# Altium PCB debugging_board_PFC161.PcbDoc
Units mm, origin at the board's own origin, x right, y up, seen from the top; angles counter-clockwise.
Board outline 67.6 x 30.7 mm, 2 copper layers (Top Layer, Bottom Layer); 46 components, 24 nets, 124 pads, 61 vias.
Unrouted connection lines stored in the file: 2.
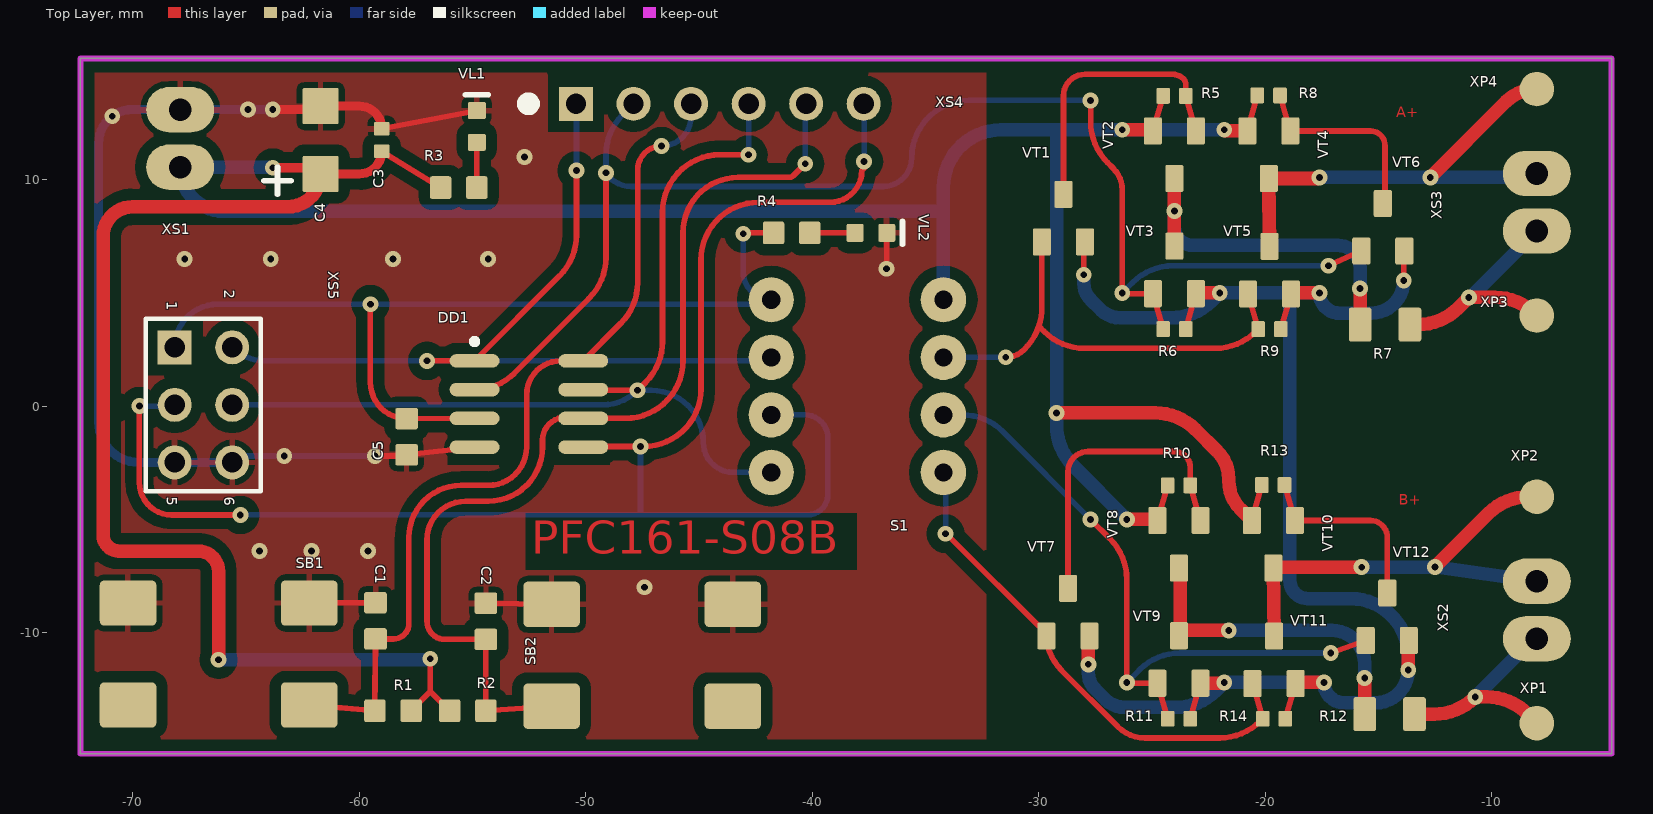
[diagram p0: Top Layer view]
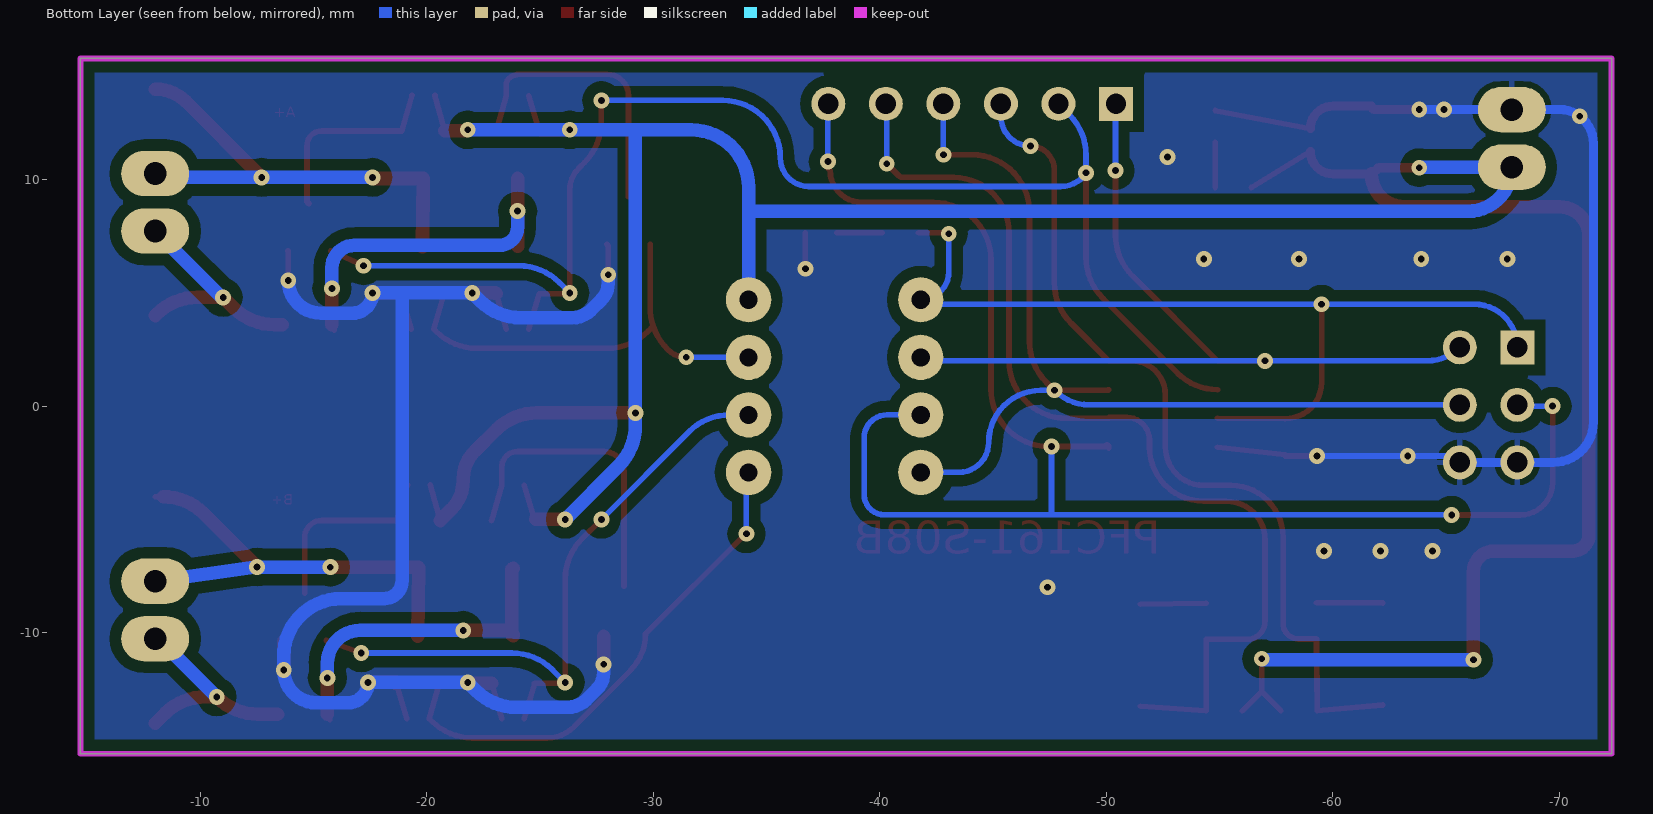
[diagram p1: Bottom Layer view, seen from below]
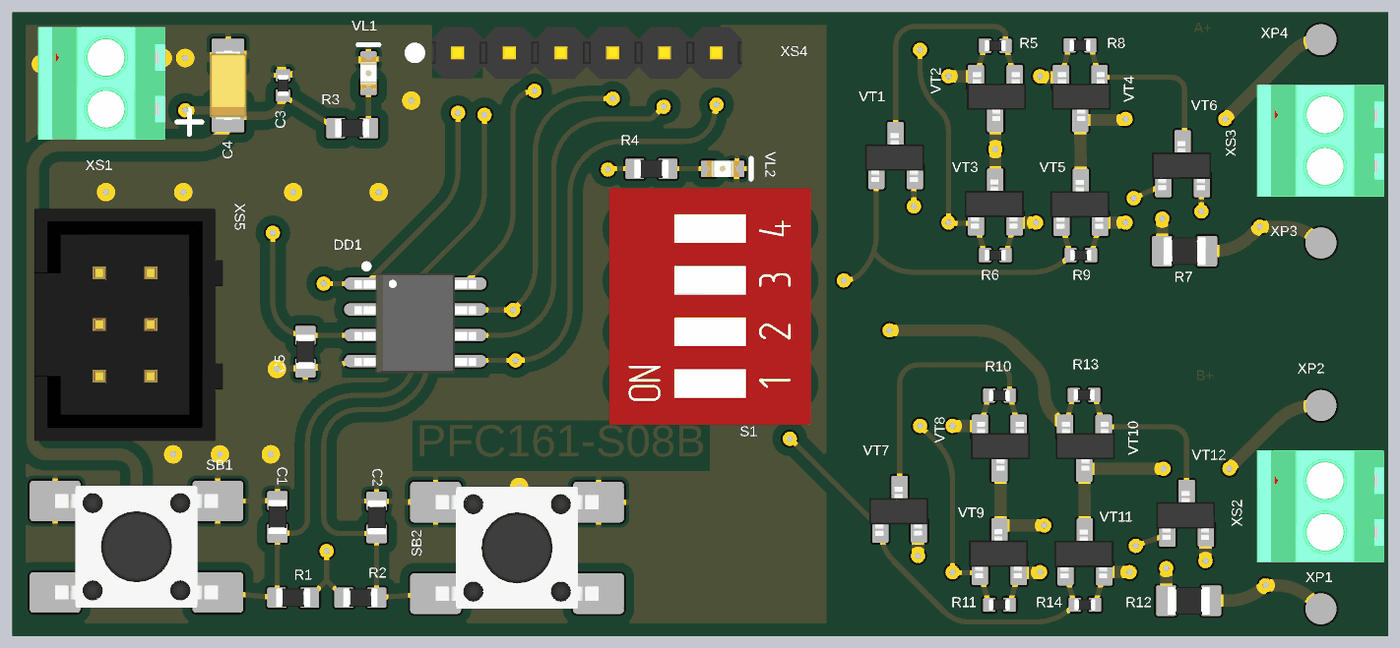
[diagram p2: 3D render of the assembled board from above, using the file's embedded part models]

## Layer stack, top to bottom
Top Solder: solder mask 0.0102, Solder Resist, Dk 3.5
Top Layer: signal copper 0.0356
Dielectric 1: dielectric 0.32, FR-4, Dk 4.8
Bottom Layer: signal copper 0.0356
Bottom Solder: solder mask 0.0102, Solder Resist, Dk 3.5

## Board outline
-72.3,-15.35 -4.7,-15.35 -4.7,15.35 -72.3,15.35

## Design rules (kind name [scope] priority, off if disabled: settings)
Clearance [All] p1: gap=0.23 ignorepadtopadclearanceinfootprint=FALSE except(0.5: Arc-Poly Track-Poly SMDPad-Poly THPad-Poly Via-Poly Fill-Poly Poly-Poly)
PolygonConnect [All] p1: thpad.connectstyle=Relief thpad.reliefconductorwidth=0.254 thpad.reliefentries=4 thpad.polygonreliefangle="90 Angle" thpad.airgapwidth=0.254 smdpad.connectstyle=Relief smdpad.reliefconductorwidth=0.254 smdpad.reliefentries=4 smdpad.polygonreliefangle="90 Angle" smdpad.airgapwidth=0.254 via.connectstyle=Direct via.reliefconductorwidth=0.254 via.reliefentries=4 via.polygonreliefangle="90 Angle" via.airgapwidth=0.254
RoomDefinition debugging_board_PFC161 [InComponentClass('debugging_board_PFC161')] p1: confinementstyle=ConfineIn formatcopy=TRUE lockcomponents=FALSE outline -133.3,-61.25 -82.5,-61.25 -82.5,-35.85 -133.3,-35.85
RoomDefinition U_MCU_PFC161 [InComponentClass('U_MCU_PFC161')] p2: confinementstyle=ConfineIn formatcopy=TRUE lockcomponents=FALSE outline -72.3,-15.55 -32.5,-15.55 -32.5,15.35 -72.3,15.35
RoomDefinition U_H_bridge_PFC1612 [InComponentClass('U_H_bridge_PFC1612')] p3: confinementstyle=ConfineIn formatcopy=TRUE lockcomponents=FALSE outline -31.7,-14.95 -11.9,-14.95 -11.9,-2.35 -31.7,-2.35
RoomDefinition U_H_bridge_PFC1611 [InComponentClass('U_H_bridge_PFC1611')] p4: confinementstyle=ConfineIn formatcopy=TRUE lockcomponents=FALSE outline -31.9,2.25 -12.1,2.25 -12.1,14.85 -31.9,14.85
RoutingVias [All] p1: holewidth=0.3 width=0.7 viastyle="Through Hole" minholewidth=0.3 minwidth=0.7 maxholewidth=0.3 maxwidth=0.7
SolderMaskExpansion [All] p1: expansion=0.102 istentingtop=FALSE
Width [All] p1: maxlimit=0.8 minlimit=0.25 preferedwidth=0.6
30 further rules are at their usual default settings.

## Classes and differential pairs
channel class H_bridge_PFC161: U_H_bridge_PFC1611 U_H_bridge_PFC1612
component class U_MCU_PFC161: C1 C2 C3 C4 C5 DD1 R1 R2 R3 R4 S1 SB1 SB2 VL1 VL2 XS4
component class U_H_bridge_PFC1612: R10 R11 R12 R13 R14 VT7 VT8 VT9 VT10 VT11 VT12
component class U_H_bridge_PFC1611: R5 R6 R7 R8 R9 VT1 VT2 VT3 VT4 VT5 VT6
component class debugging_board_PFC161: XP1 XP2 XP3 XP4 XS2 XS4

## Components (designator, comment, footprint, x,y, rotation, side; value= is the part's Value field where it differs from the comment)
C1 "0,1uF" SMD0603(1005) -59.275,-9.48 r270 top
C2 "0,1uF" SMD0603(1005) -54.4,-9.5 r270 top
C3 "0,1uF" SMD0402(1608) -59,11.75 r90 top
C4 "10uF x 10V" TANT_CAP_A(3216) -61.7,11.75 r90 top
C5 "10nF" SMD0603(1005) -57.9,-1.35 r90 top
DD1 "PFC161-S08B" SOIC8 -52.5,0.055 r0 top
R1 "20k" SMD0603(1005) -58.5,-13.45 r0 top
R2 "20k" SMD0603(1005) -55.2,-13.45 r180 top
R3 "500" SMD0603(1005) -55.6,9.65 r0 top
R4 "500" SMD0603(1005) -40.9,7.65 r0 top
R5 "20к" SMD0402(1608) -24,13.7 r0 top
R6 "20к" SMD0402(1608) -24,3.4 r0 top
R7 "10" SMD0805(2012) -14.7,3.6 r180 top
R8 "20к" SMD0402(1608) -19.838,13.719 r0 top
R9 "20к" SMD0402(1608) -19.8,3.4 r0 top
R10 "20к" SMD0402(1608) -23.8,-3.5 r0 top (schematic designator R5)
R11 "20к" SMD0402(1608) -23.8,-13.8 r0 top (schematic designator R6)
R12 "10" SMD0805(2012) -14.5,-13.6 r180 top (schematic designator R7)
R13 "20к" SMD0402(1608) -19.638,-3.481 r0 top (schematic designator R8)
R14 "20к" SMD0402(1608) -19.6,-13.8 r0 top (schematic designator R9)
S1 "DS1040-04RN" DIP_SWITCH_4_2.54 -34.2,-2.925 r180 top
SB1 "KLS7-TS6604" "KLS7-TS6604 (IT-1102SA)" -66.2,-10.945 r270 top
SB2 "KLS7-TS6604" "KLS7-TS6604 (IT-1102SA)" -47.5,-11 r90 top
VL1 "TO-1608BC-MRE" LED_SMD0603(1005) -54.8,12.35 r90 top
VL2 "TO-1608BC-PG" LED_SMD0603(1005) -37.4,7.65 r0 top
VT1 "IRLML0040TRPBF" SOT23-3 -28.9,8.3 r90 top
VT2 "IRLML2244TRPBF" SOT23-3 -24,11.1 r270 top
VT3 "IRLML0040TRPBF" SOT23-3 -24,6.015 r90 top
VT4 "IRLML2244TRPBF" SOT23-3 -19.828,11.1 r270 top
VT5 "IRLML0040TRPBF" SOT23-3 -19.8,6 r90 top
VT6 "IRLML0040TRPBF" SOT23-3 -14.8,7.9 r90 top
VT7 "IRLML0040TRPBF" SOT23-3 -28.7,-9.1 r90 top (schematic designator VT1)
VT8 "IRLML2244TRPBF" SOT23-3 -23.8,-6.1 r270 top (schematic designator VT2)
VT9 "IRLML0040TRPBF" SOT23-3 -23.8,-11.185 r90 top (schematic designator VT3)
VT10 "IRLML2244TRPBF" SOT23-3 -19.628,-6.1 r270 top (schematic designator VT4)
VT11 "IRLML0040TRPBF" SOT23-3 -19.6,-11.2 r90 top (schematic designator VT5)
VT12 "IRLML0040TRPBF" SOT23-3 -14.6,-9.3 r90 top (schematic designator VT6)
XP1 "A+" XP_solder#1 -7.7,-14.1 r0 top
XP2 "A-" XP_solder#2 -7.9,-4.4 r90 top
XP3 "B+" XP_solder#3 -9.4,2.9 r90 top
XP4 "B-" XP_solder#4 -9.6,14.9 r90 top
XS1 "Клемник винтовой" XS_2x2.54MM -67.9,11.82 r90 top
XS2 "Клемник винтовой" XS_2x2.54MM -8,-9 r90 top
XS3 "Клемник винтовой" XS_2x2.54MM -8,9 r90 top
XS4 "PLS1x6" PLS1x6 -50.42,13.35 r90 top
XS5 "IDC6" "IDC-6 (2.54)" -68.14,2.595 r270 top

## Footprints (in the part's own frame and the unit in brackets; to place one, negate y for a bottom-side part, rotate by r counter-clockwise, add the part's x,y. Pads: shape width x height; smd on the part's side, far side on the other; paste and mask are expansions set on the pad)
DIP_SWITCH_4_2.54 [mm]
  round 2 hole 0.8: 1(0,0) 2(0,-2.54) 3(0,-5.08) 4(0,-7.62) 5(7.6,-7.62) 6(7.6,-5.08) 7(7.6,-2.54) 8(7.6,0)
  body extent -1.14,-9.62 8.76,2, height 6.8
"IDC-6 (2.54)" [mm]
  rect 1.5x1.5 hole 0.9: 1(0,0)
  round 1.5 hole 0.9: 2(0,2.54) 3(2.54,0) 4(2.54,2.54) 5(5.08,0) 6(5.08,2.54)
  silkscreen extent -1.27,-1.27 6.35,3.81, body extent -3.1,-3.07 8.33,6.2, height 9.27
"KLS7-TS6604 (IT-1102SA)" [mm]
  rrect20% 2x2.5 smd: 1(-2.25,4) 1(-2.25,-4) 2(2.25,4) 2(2.25,-4)
  body extent -3,-4 3,4, height 5
LED_SMD0603(1005) [mm] "Chip Resistor, Body 0.6x0.3mm, IPC Medium Density"
  rrect20% 0.75x0.8 smd: 1(-0.7,0) 2(0.7,0)
  silkscreen extent 1.4,-0.5 1.4,0.5, body extent -0.8,-0.4 0.8,0.4, height 0.55
PLS1x6 [mm]
  rect 1.5x1.5 hole 0.9: 1(0,0)
  round 1.5 hole 0.9: 2(0,-2.54) 3(0,-5.08) 4(0,-7.62) 5(0,-10.16) 6(0,-12.7)
  silkscreen extent -0.25,1.85 0.25,2.35, body extent -1.27,-13.97 1.27,1.27, height 8.6
SMD0402(1608) [mm] "Chip Resistor, Body 0.6x0.3mm, IPC Medium Density"
  rrect20% 0.6x0.7 smd: 1(-0.5,0) 2(0.5,0)
  body extent -0.52,-0.27 0.53,0.27, height 0.4
SMD0603(1005) [mm] "Chip Resistor, Body 0.6x0.3mm, IPC Medium Density"
  rrect20% 0.95x1 smd: 1(-0.8,0) 2(0.8,0)
  body extent -0.85,-0.45 0.85,0.45, height 0.55
SMD0805(2012) [mm] "Chip Resistor, Body 0.6x0.3mm, IPC Medium Density"
  rrect20% 1x1.5 smd: 1(-1.1,0) 2(1.1,0)
  body extent -1.05,-0.68 1.05,0.67, height 0.6
SOIC8 [mm]
  oval 2.2x0.6 smd: 1(-2.4,1.945) 2(-2.4,0.675) 3(-2.4,-0.595) 4(-2.4,-1.865) 5(2.4,-1.865) 6(2.4,-0.595) 7(2.4,0.675) 8(2.4,1.945)
  silkscreen extent -2.52,2.67 -2.27,2.92, body extent -2.99,-2.45 2.99,2.45, height 1.35
SOT23-3 [mm]
  rrect20% 1.2x0.8 smd: 1(-1.05,0.95) 2(-1.05,-0.95) 3(1.05,0)
  body extent -1.3,-1.4 1.1,1.5, height 1
TANT_CAP_A(3216) [mm]
  rrect10% 1.6x1.6 smd: 1(-1.5,0) 2(1.5,0)
  silkscreen extent -2.4,1.3 -1.2,2.5, body extent -1.7,-0.9 1.7,0.9, height 1.8
XP_solder#1 [mm]
  round 1.524 smd: 1(-0.3,0.1)
XP_solder#2 [mm]
  round 1.524 smd: 1(0.4,0.1)
XP_solder#3 [mm]
  round 1.524 smd: 1(1.1,-1.4)
XP_solder#4 [mm]
  round 1.524 smd: 1(-0.9,-1.6)
XS_2x2.54MM [mm]
  oval 2x3 hole 1: 1(-1.27,0) 2(1.27,0)
  body extent -2.73,-3.12 2.8,3.15, height 8.5

## Part data
C1 C2: Package=SMD0603, ValueBOM="Конденсатор керамический 0,1мкФ SMD 0603 1%", Type=C
C3: Package=SMD0402, ValueBOM="Конденсатор керамический 0,1мкФ х 50В SMD 0402 1%", Type=C
C4: Package="SMD A", ValueBOM="Конденсатор танталовый 10мкФ х 10В SMD A", Type=C
C5: Package=SMD0402, ValueBOM="Конденсатор керамический 10нФ х 50В SMD 0402 1%", Type=C
DD1: Package=SOIC-8, ValueBOM="Микроконтроллер PFC161-S08B, SOIC-8", Type=DD
R1 R2: Package=SMD0603, ValueBOM="Резистор 20кОм SMD 0603 1%", Type=R
R3 R4: Package=SMD0603, ValueBOM="Резистор 500 Ом SMD 0603 1%", Type=R
R5 R6 R8 R9 R10 R11 R13 R14: Package=SMD0402, ValueBOM="Резистор 20кОм SMD 0402 1%", Type=R
R7 R12: Package=SMD0805, ValueBOM="Резистор 10 Ом SMD 0805 1%", Type=R
S1: library part "Переключатель DIP DS1040-04RN", Package=DIP, Type=S, ValueBOM="Переключатель DIP DS1040-04RN"
SB1 SB2: Package="SMD 6х6х5mm", ValueBOM="KLS7-TS6604-5.0-180 (IT-1102SA), Кнопка тактовая 6х6х5мм SMD", Type=SB
VL1: Package=SMD0603, ValueBOM="Светодиод Красный TO-1608BC-MRE SMD0603", Light=Красный, Type=VL
VL2: Package=SMD0603, ValueBOM="Светодиод Зелёный TO-1608BC-PG SMD0603", Light=Зелёный, Type=VL
VT1 VT3 VT5 VT6 VT7 VT9 VT11 VT12: library part VT_N_MOSFET_SOT23_3, Package=SOT-23, ValueBOM="Транзистор n-МОП IRLML0040TRPBF SOT23", Type=VT
VT2 VT4 VT8 VT10: library part VT_P_MOSFET_SOT23_3, Package=SOT-23, ValueBOM="Транзистор p-МОП IRLML2244TRPBF SOT23", Type=VT
XP1 XP2 XP3 XP4: library part XP_solder
XS1 XS2 XS3: library part "Клемник винтовой 2-контактный, 2,54мм", Package=2,54mm, ValueBOM="308-021-14, Клеммник винтовой, 2-контактный, 2.54мм, прямой", Type=XS
XS4: Package=2,54mm, ValueBOM="Разъём PLS1x6 прямой", Type=XS
XS5: Package=2,54mm, ValueBOM="Разъём IDC6 прямой", Type=XS

## Via types
v1: diameter 0.7, hole 0.3, Top Layer to Bottom Layer, 61 vias

## Nets (pads, with @x,y where several pads share a name; then routed paths per layer and width w, separated by ;. In a path a pad name is that pad's centre, name@x,y a point inside that pad or via, vN(x,y) a via of type N, cw(c..) or ccw(c..) an arc to the next point about the centre after c; other vN are vias at no path point)
+5V: C3.1 C4.1 R1.2 R2.2 R3.1 R5.1 R8.1 R10.1 R13.1 S1.4 VT2.2 VT4.2 VT8.2 VT10.2 XS1.1 | length 154.1
  Top Layer w0.25: C4.1@-62.367,10.526 cw(c-62.367,9.583) -61.939,10.424 cw(c-62.367,9.583) C4.1 ; C3.1 R3.1 ; R1.2 -56.857,-12.607 -56.857,-12.593 ; v1(-56.857,-11.154) -56.857,-12.593 ; R2.2 -56.857,-12.593 ; VT2.2@-25,12.2 cw(c-25,12.15) VT2.2 R5.1 ; VT8.2@-24.8,-5 cw(c-24.8,-5.05) VT8.2 R10.1 ; v1(-21.8,12.2) ccw(c-21.75,12.2) v1@-21.75,12.15 ; VT4.2 R8.1 R8.1@-20.35,13.719 ; VT10.2 R13.1
  Top Layer w0.4: v1(-63.808,10.526) -62.367,10.526 -62.042,10.526 cw(c-62.042,10.424) C4.1@-61.939,10.424 ; C4.1 -60,10.25 ccw(c-60,11.25) C3.1
  Top Layer w0.6: v1(-66.203,-11.196) -66.2,-11.196 -66.2,-7.3 ccw(c-67.1,-7.3) -67.1,-6.4 -70.6,-6.4 cw(c-70.6,-5.7) -71.3,-5.7 -71.3,7.5 cw(c-70,7.5) -70,8.8 -63.15,8.8 ccw(c-63.15,10.25) C4.1 ; v1(-29.2,-0.3) -24.852,-0.3 cw(c-24.852,-2.84) -23.056,-1.044 -22.1,-2 cw(c-23.307,-3.207) -21.6,-3.207 -21.6,-3.3 ccw(c-19.842,-3.3) -21.085,-4.543 VT10.2 ; v1(-26.3,12.2) VT2.2@-25,12.2 ; v1(-26.1,-5) VT8.2@-24.8,-5 ; v1@-21.75,12.15 VT4.2
  Bottom Layer w0.6: v1(-66.203,-11.196) -56.9,-11.196 ccw(c-56.9,-11.154) v1(-56.857,-11.154) ; v1(-63.808,10.526) ccw(c-63.832,10.526) -63.832,10.55 XS1.1 ccw(c-65.95,10.55) -65.95,8.6 -34.2,8.6 ; S1.4 -34.2,9.66 cw(c-31.66,9.66) -31.66,12.2 -29.2,12.2 ; v1(-26.1,-5) -28.456,-2.644 cw(c-26.66,-0.848) -29.2,-0.848 v1(-29.2,-0.3) -29.2,12.2 ; v1(-21.8,12.2) v1(-26.3,12.2) -29.2,12.2
GND: C1.1 C2.1 C3.2 C4.2 C5.1 DD1.4 R6.2 R9.2 R11.2 R14.2 SB1.1 SB2.2 VL1.2 VL2.2 VT1.2 VT3.2 VT5.2 VT6.2 VT7.2 VT9.2 VT11.2 VT12.2 XS1.2 XS5.5 XS5.6 | length 128.7
  Top Layer w0.25: SB1.1@-62.2,-8.695 C1.1 ; C4.2@-62.068,13.097 ccw(c-62.068,13.618) C4.2 ; v1(-59.3,-2.2) -57.9,-2.2 C5.1 DD1.4 ; C3.2 VL1.2 ; C2.1 SB2.2@-51.5,-8.75 ; v1(-36.708,6.066) -36.708,7.65 VL2.2 ; v1(-28,5.8) -28,7.029 cw(c-27.829,7.029) VT1.2@-27.95,7.15 ; VT7.2@-27.8,-10.171 cw(c-27.629,-10.171) VT7.2@-27.75,-10.05 ; R6.2 VT3.2 ; R11.2 VT9.2 ; R9.2 VT5.2 ; R14.2 VT11.2 v1(-17.4,-12.2) ; v1(-13.874,5.551) -13.874,6.826 cw(c-13.85,6.826) VT6.2 ; VT12.2@-13.674,-10.374 cw(c-13.65,-10.374) VT12.2
  Top Layer w0.4: v1(-63.808,13.097) -62.068,13.097 -61.853,13.097 ccw(c-61.853,13.25) C4.2 -60,13.25 cw(c-60,12.25) C3.2
  Top Layer w0.6: v1(-27.8,-11.4) VT7.2@-27.8,-10.171 ; VT3.2 cw(c-23.015,4.965) -23.015,5 v1(-22,5) ; VT9.2 -21.835,-12.235 ccw(c-21.835,-12.2) v1(-21.8,-12.2) ; VT5.2 cw(c-18.8,4.95) -18.8,5 v1(-17.6,5) ; VT11.2 cw(c-18.6,-12.25) -18.6,-12.2 v1(-17.4,-12.2) ; v1(-13.674,-11.649) VT12.2@-13.674,-10.374
  Bottom Layer w0.25: XS5.6 -65.6,-2.116 -65.516,-2.2 v1(-59.3,-2.2)
  Bottom Layer w0.4: XS5.6 XS5.5 -69.715,-2.485 cw(c-69.715,-0.7) -71.5,-0.7 -71.5,11.6 cw(c-70,11.6) -70,13.1 -67.9,13.1 XS1.2 -63.808,13.09 v1(-63.808,13.097)
  Bottom Layer w0.6: v1(-28,5.8) -28,5.424 ccw(c-26.976,5.424) -27.7,4.7 -27.254,4.254 ccw(c-26.4,5.107) -26.4,3.9 -24.152,3.9 ccw(c-24.152,6.44) -22.356,4.644 v1(-22,5) -18.9,5 ; v1(-27.8,-11.4) -27.8,-11.776 ccw(c-26.776,-11.776) -27.5,-12.5 -27.054,-12.946 ccw(c-26.2,-12.093) -26.2,-13.3 -23.952,-13.3 ccw(c-23.952,-10.76) -22.156,-12.556 v1(-21.8,-12.2) v1(-17.4,-12.2) ccw(c-16.5,-12.2) -16.5,-13.1 -15.125,-13.1 ccw(c-15.125,-11.649) v1(-13.674,-11.649) -13.674,-11.04 ccw(c-16.214,-11.04) -16.214,-8.5 -18.1,-8.5 cw(c-18.1,-7.7) -18.9,-7.7 -18.9,5 ; v1(-13.874,5.551) cw(c-15.325,5.551) -15.325,4.1 -16.7,4.1 cw(c-16.7,5) v1(-17.6,5) -18.9,5
  other v1: -47.4,-8 -64.4,-6.4 -62.1,-6.4 -59.6,-6.4 -63.3,-2.2 -67.7,6.5 -63.9,6.5 -58.5,6.5 -54.3,6.5 -52.7,11 -70.9,12.8 -64.908,13.097
NetR3_2: R3.2 VL1.1 | length 2
  Top Layer w0.25: R3.2 VL1.1
NetR4_2: R4.2 VL2.1 | length 2
  Top Layer w0.25: R4.2 VL2.1
NetR5_2: R5.2 VT1.3 VT2.1 | length 12.7
  Top Layer w0.25: VT1.3@-28.9,9.25 -28.9,10.697 ; -28.9,10.698 -28.9,13.7 cw(c-27.95,13.7) -27.95,14.65 -24.083,14.65 cw(c-24.083,13.967) -23.6,14.45 cw(c-23.841,14.209) -23.5,14.209 R5.2 VT2.1
NetR7_1: R7.1 XP3.1 XS3.1 | length 10.4
  Top Layer w0.6: R7.1 -13.252,3.6 ccw(c-13.252,6.14) -11.456,4.344 v1(-11,4.8) -9.852,4.8 cw(c-9.852,2.26) -8.056,4.056 XP3.1
  Bottom Layer w0.25: v1(-11,4.8) ccw(c-11,4.969) v1@-10.881,4.849
  Bottom Layer w0.6: v1@-10.88,4.85 XS3.1
NetR7_2: R7.2 VT2.3 VT3.3 | length 15.7
  Top Layer w0.25: R7.2@-15.9,3.359 cw(c-15.559,3.359) R7.2
  Top Layer w0.6: VT3.3 v1(-24,8.612) ; v1@-24,8.557 v1(-24,8.612) ; VT2.3 v1(-24,8.612) ; R7.2 v1(-15.8,5.2)
  Bottom Layer w0.6: v1(-24,8.612) -24,7.9 ccw(c-23.2,7.9) -23.2,7.1 -16.8,7.1 cw(c-16.8,6.1) -15.8,6.1 v1(-15.8,5.2)
NetR8_2: R8.2 VT4.1 VT6.3 | length 8.8
  Top Layer w0.25: R8.2 VT4.1 -15.35,12.15 cw(c-15.35,11.5) -14.7,11.5 -14.7,9.05 cw(c-14.8,9.05) VT6.3
NetR9_1: R9.1 S1.3 VT1.1 VT5.1 | length 20.8
  Top Layer w0.25: v1(-31.445,2.155) ccw(c-31.445,3.3) -30.636,2.489 ccw(c-32.531,4.386) -29.99,3.53 ; VT1.1@-29.85,7.15 -29.85,4.386 cw(c-32.531,4.386) -29.99,3.53 ; VT5.1 R9.1 -20.406,3.294 cw(c-22.202,5.09) -22.202,2.55 -25.491,2.55 -25.493,2.55 -27.958,2.55 cw(c-27.958,5.09) -29.754,3.294 -29.99,3.53
  Bottom Layer w0.25: S1.3 v1(-31.445,2.155) ; v1(-31.445,2.155) ccw(c-31.445,2.3) -31.3,2.3 v1(-31.445,2.155)
NetR10_2: R10.2 VT7.3 VT8.1 | length 13.8
  Top Layer w0.25: VT7.3@-28.7,-7.95 -28.7,-2.9 cw(c-27.8,-2.9) -27.8,-2 -24,-2 cw(c-24,-2.7) -23.3,-2.7 R10.2 VT8.1
NetR11_1: R11.1 S1.2 VT9.1 VT12.1 | length 30.3
  Top Layer w0.25: v1(-27.7,-5) -26.844,-5.856 cw(c-28.64,-7.652) -26.1,-7.652 v1(-26.1,-12.2) ccw(c-26.015,-12.115) -26.015,-12.235 VT9.1 R11.1 ; v1(-17.1,-10.9) VT12.1 cw(c-15.671,-10.229) VT12.1@-15.671,-10.4
  Bottom Layer w0.25: S1.2 -33.367,-0.385 cw(c-33.367,-2.925) -31.571,-1.129 v1(-27.7,-5) ; v1(-26.1,-12.2) -25.543,-11.643 cw(c-23.747,-13.439) -23.747,-10.899 -22.748,-10.899 -22.752,-10.897 ; -22.748,-10.9 v1(-17.1,-10.9)
NetR12_1: R12.1 XP1.1 XS2.1 | length 9.8
  Top Layer w0.6: R12.1 -12.534,-13.6 ccw(c-12.534,-11.06) -10.738,-12.856 v1(-10.72,-12.838) ; v1@-10.748,-12.85 ccw(c-10.748,-12.81) v1(-10.72,-12.838) ; XP1.1 -8.418,-13.582 ccw(c-10.214,-15.378) -10.214,-12.838 v1(-10.72,-12.838)
  Bottom Layer w0.25: XS2.1@-8.259,-10.377 cw(c-8,-10.636) XS2.1
  Bottom Layer w0.6: v1(-10.72,-12.838) XS2.1@-8.259,-10.377
NetR12_2: R12.2 VT8.3 VT9.3 | length 14.7
  Top Layer w0.25: R12.2@-15.7,-13.841 cw(c-15.359,-13.841) R12.2
  Top Layer w0.6: VT8.3 -23.75,-7.2 -23.75,-8.693 VT9.3@-23.75,-9.99 ; v1(-21.6,-9.9) -23.565,-9.9 ccw(c-23.565,-10.135) VT9.3@-23.75,-9.99 ; R12.2 v1(-15.6,-12) ; VT9.3@-23.75,-9.99 ccw(c-23.565,-10.135) VT9.3 -23.75,-10.085 VT9.3@-23.75,-9.99
  Bottom Layer w0.6: v1(-21.6,-9.9) -17.052,-9.9 cw(c-17.052,-11.352) -15.6,-11.352 v1(-15.6,-12)
NetR13_2: R13.2 VT10.1 VT12.3 | length 8.6
  Top Layer w0.25: R13.2 VT10.1 -15.35,-5.05 cw(c-15.35,-5.8) -14.6,-5.8 VT12.3
NetR14_1: R14.1 S1.1 VT7.1 VT11.1 | length 22.7
  Top Layer w0.25: v1(-34.102,-5.635) cw(c-34.102,-5.722) -34.04,-5.66 -29.65,-10.05 ccw(c-27.356,-10.05) -28.978,-11.672 -26.5,-14.15 ccw(c-25.293,-12.943) -25.293,-14.65 -22.002,-14.65 ccw(c-22.002,-12.11) -20.206,-13.906 R14.1 VT11.1
  Bottom Layer w0.25: S1.1 cw(c-34.437,-3.162) -34.102,-3.162 v1(-34.102,-5.635)
NetVT4_3: VT4.3 VT5.3 XP4.1 XS3.2 | length 21.1
  Top Layer w0.6: VT5.3 VT4.3 -17.721,10.05 ccw(c-17.721,10.221) v1(-17.6,10.1) ; v1(-12.7,10.1) -9.366,13.434 cw(c-8,12.069) XP4.1
  Bottom Layer w0.6: v1(-17.6,10.1) v1(-12.7,10.1) -8.41,10.1 ccw(c-8.41,10.68) XS3.2
NetVT10_3: VT10.3 VT11.3 XP2.1 XS2.2 | length 20.4
  Top Layer w0.25: XP2.1@-8.348,-4 XP2.1
  Top Layer w0.6: VT11.3 VT10.3 cw(c-19.588,-7.15) -19.588,-7.11 v1(-15.732,-7.11) ; v1(-12.5,-7.1) -10.144,-4.744 cw(c-8.348,-6.54) XP2.1@-8.348,-4
  Bottom Layer w0.6: v1(-15.732,-7.11) -12.51,-7.11 v1(-12.5,-7.1) XS2.2
PA3: DD1.7 S1.8 XS4.4 XS5.4 | length 44.2
  Top Layer w0.25: DD1.7 ccw(c-50.027,0.803) -50.027,0.7 v1(-47.7,0.7) -47.344,1.056 ccw(c-49.14,2.852) -46.6,2.852 -46.6,8.56 cw(c-44.06,8.56) -44.06,11.1 v1(-42.8,11.1)
  Bottom Layer w0.25: XS5.4 -49.257,0.055 ccw(c-49.257,2.257) v1(-47.7,0.7) -47.1,0.7 cw(c-47.1,-1.6) -44.8,-1.6 ccw(c-43.475,-1.6) -43.475,-2.925 S1.8 ; v1(-42.8,11.1) XS4.4
PA4: C1.2 DD1.8 R1.1 SB1.2 XS4.3 | length 38.6
  Top Layer w0.25: SB1.2@-62.2,-13.195 R1.1 C1.2 -58.48,-10.28 ccw(c-58.48,-9.6) -57.8,-9.6 -57.8,-5.8 cw(c-55.5,-5.8) -55.5,-3.5 -54.3,-3.5 ccw(c-54.3,-1.8) -52.6,-1.8 -52.6,0.5 cw(c-51.1,0.5) -51.1,2 DD1.8 -48.444,3.656 ccw(c-50.24,5.452) -47.7,5.452 -47.7,10.427 cw(c-46.641,10.427) v1(-46.641,11.485)
  Bottom Layer w0.25: v1(-46.641,11.485) ccw(c-46.641,12.787) -45.34,12.787 XS4.3 ccw(c-45.195,13.205) XS4.3@-45.4,13.205
PA5: DD1.1 S1.6 XS4.1 XS5.2 | length 39.4
  Top Layer w0.25: v1(-57,2) DD1.1 -51.144,5.756 ccw(c-52.94,7.552) -50.4,7.552 v1(-50.4,10.4)
  Bottom Layer w0.25: XS5.2 ccw(c-64.163,4.032) -64.163,2 v1(-57,2) -41.955,2 ccw(c-41.955,2.155) S1.6 ; XS4.1 cw(c-50.468,13.302) -50.4,13.302 -50.268,13.169 -50.4,13.037 v1(-50.4,10.4)
PA6: DD1.5 S1.7 XS4.6 XS5.3 | length 75.8
  Top Layer w0.25: v1(-69.7,0) -69.7,-3.373 ccw(c-68.27,-3.373) -68.27,-4.803 -68.268,-4.803 v1(-65.241,-4.803) ; DD1.5@-50.1,-1.86 DD1.5 cw(c-50.004,-1.81) -50.004,-1.714 -49.936,-1.782 v1(-47.571,-1.782) -47.44,-1.782 ccw(c-47.44,0.758) -44.9,0.758 -44.9,6.46 cw(c-42.36,6.46) -42.36,9 -39.2,9 ccw(c-39.2,10.4) -37.8,10.4 -37.7,10.5 v1(-37.7,10.8)
  Bottom Layer w0.25: v1(-69.7,0) -68.195,0 ccw(c-68.195,0.055) XS5.3 ; -60.3,-4.8 v1(-65.241,-4.803) -40.2,-4.8 ccw(c-40.2,-3.9) -39.3,-3.9 -39.3,-1.4 ccw(c-40.315,-1.4) -40.315,-0.385 S1.7 ; v1@-47.611,-1.951 cw(c-47.361,-1.957) -47.601,-1.888 v1(-47.571,-1.782) -47.571,-2.26 ; v1@-47.571,-1.821 -47.571,-2.26 ; -47.5,-4.8 cw(c-47.5,-4.729) -47.571,-4.729 -47.571,-2.26 ; XS4.6 ccw(c-37.72,13.27) -37.8,13.27 -37.7,13.17 v1(-37.7,10.8)
PA7: DD1.2 R6.1 VT3.1 VT6.1 XS4.2 | length 62.7
  Top Layer w0.25: DD1.2 ccw(c-54.9,3.217) -53.141,1.459 -49.844,4.756 ccw(c-51.64,6.552) -49.1,6.552 v1(-49.1,10.3) ; v1(-27.7,13.5) -27.7,12.552 ccw(c-25.16,12.552) -26.956,10.756 -26.7,10.5 cw(c-27.666,9.534) -26.3,9.534 v1(-26.3,5) ccw(c-26.215,5.085) -26.215,4.965 VT3.1 R6.1 ; v1(-17.2,6.2) VT6.1@-15.861,6.8 ; VT6.1@-15.871,6.8 ccw(c-15.871,6.971) VT6.1@-15.861,6.8 ; VT6.1@-15.861,6.8 ccw(c-15.871,6.971) VT6.1 VT6.1@-15.861,6.8
  Bottom Layer w0.25: XS4.2 -48.356,12.874 ccw(c-46.56,11.078) -49.1,11.078 v1(-49.1,10.3) ccw(c-48.857,10.359) -49.048,10.198 ccw(c-47.965,11.127) -47.969,9.7 -36.86,9.7 ccw(c-36.86,10.96) -35.6,10.96 cw(c-33.06,10.96) -33.06,13.5 v1(-27.7,13.5) ; v1(-26.3,5) -25.844,5.456 cw(c-24.048,3.66) -24.048,6.2 v1(-17.2,6.2)
PB0: C2.2 DD1.6 R2.1 SB2.1 XS4.5 | length 44.1
  Top Layer w0.25: SB2.1@-51.5,-13.25 R2.1 C2.2 -56.2,-10.3 cw(c-56.2,-9.5) -57,-9.5 -57,-5.9 cw(c-55.3,-5.9) -55.3,-4.2 -54.3,-4.2 ccw(c-54.3,-1.8) -51.9,-1.8 -51.9,-1.5 cw(c-50.9,-1.5) -50.9,-0.5 -50.14,-0.5 cw(c-50.14,-0.54) DD1.6 -48.24,-0.54 ccw(c-48.24,2) -45.7,2 -45.7,7.66 cw(c-43.26,7.66) -43.26,10.1 -41.004,10.1 ccw(c-41.004,10.35) -40.826,10.174 v1(-40.3,10.7)
  Bottom Layer w0.25: v1(-40.3,10.7) -40.3,13.31 cw(c-40.26,13.31) XS4.5
VDD: C5.2 DD1.3 R4.1 S1.5 XS5.1 | length 41.6
  Top Layer w0.25: v1(-59.5,4.5) -59.5,1.05 ccw(c-57.9,1.05) C5.2 DD1.3 ; v1(-43.036,7.611) cw(c-42.997,7.611) -42.997,7.65 R4.1
  Bottom Layer w0.25: XS5.1 cw(c-66.235,2.595) -66.235,4.5 v1(-59.5,4.5) -41.8,4.5 S1.5 cw(c-41.8,5.931) -43.036,5.931 v1(-43.036,7.611)

## Polygon pours and split planes (outlines as drawn)
GND on Bottom Layer "NONET_L-01_P-001" (solid, remove dead copper, pour order 1): -72.3,15.35 -72.3,-15.35 -4.7,-15.35 -4.7,15.35
GND on Top Layer "NONET_L-01_P-001" (solid, remove dead copper, pour order 0): -72.3,15.35 -72.3,-15.35 -4.7,-15.35 -4.7,15.35

## Keep-outs
Keep-Out Layer:
  the board outline again, w0.254

## Other copper
Top Layer:
  pour cut-out: -56.103,2.699 -56.103,-2.617 -48.9,-2.617 -48.9,2.7
  pour cut-out: -32.3,15.2 -32.3,-15.5 -4.7,-15.5 -4.7,15.2
  text "A+" at -14.2,12.6 h0.8
  text "B+" at -14.1,-4.5 h0.8
  text "PFC161-S08B" at -52.4,-7 h2.5

## Text inside footprints (layer, text, board x,y; h text height)
XS5: Top Overlay "1" at -68.648,4.627 h0.8 r270; Top Overlay "2" at -66.108,5.135 h0.8 r270; Top Overlay "5" at -68.648,-4.009 h0.8 r270; Top Overlay "6" at -66.108,-4.009 h0.8 r270